# Altium PCB PCB_OPLL+DCSG MegaMod_2021-11-02.pcbdoc
Units mil, origin at the board's own origin, x right, y up, seen from the top; angles counter-clockwise.
Board outline 5030 x 3545 mil, 2 copper layers (Top Layer, Bottom Layer); 26 components, 32 nets, 155 pads, 12 vias.
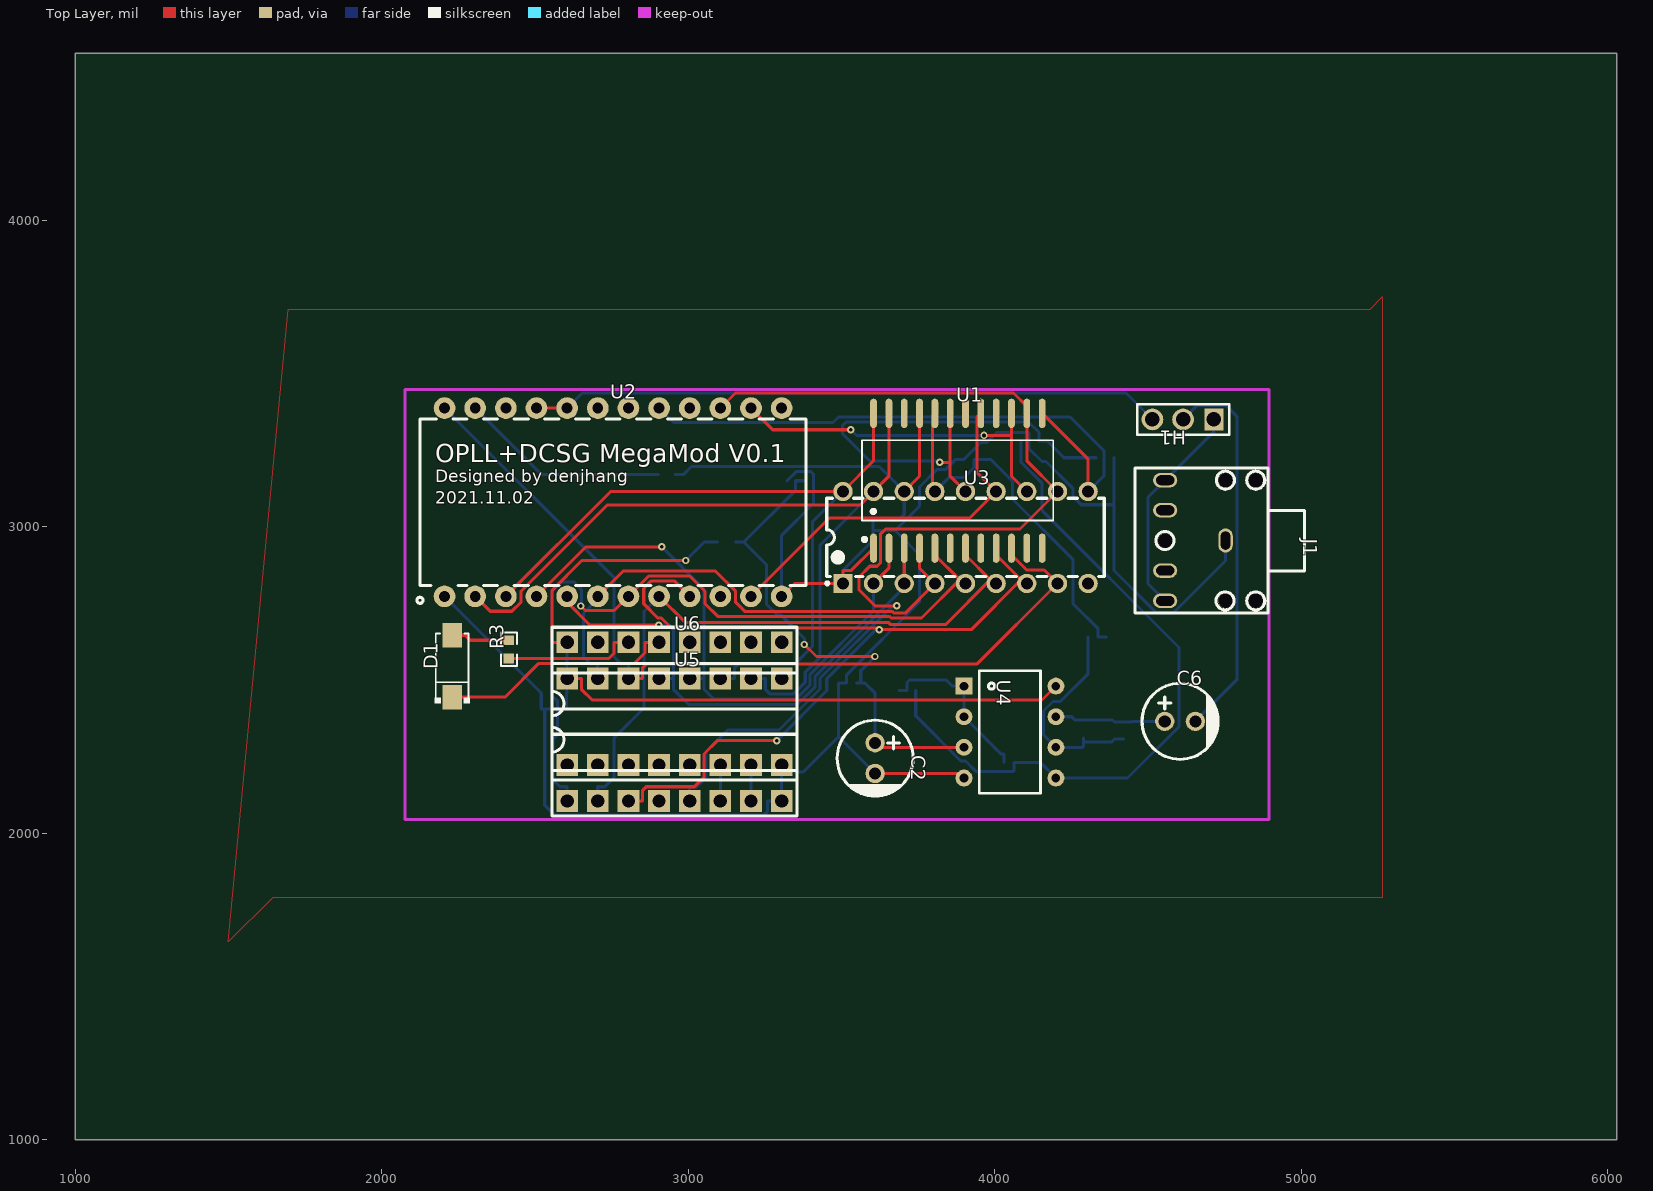
[diagram p0: Top Layer view]
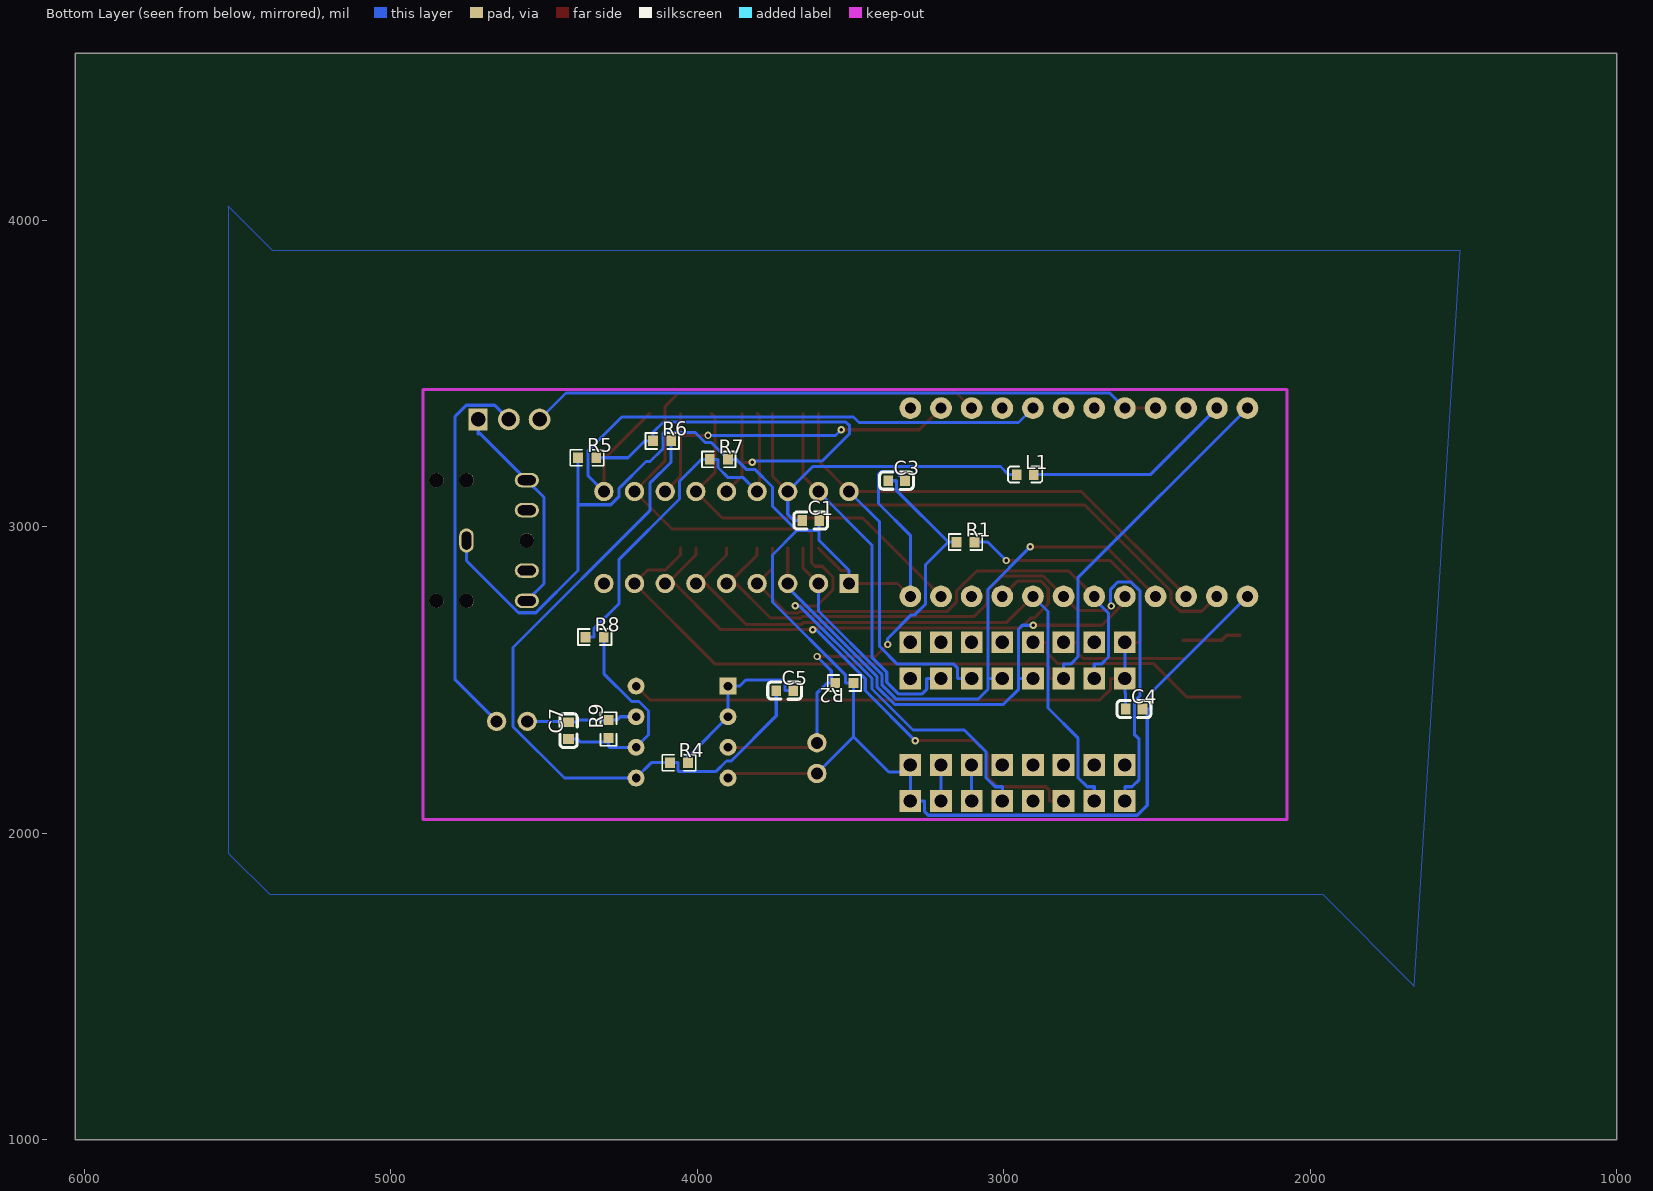
[diagram p1: Bottom Layer view, seen from below]

## Layer stack, top to bottom
Top Layer: signal copper (thickness not stored)
Dielectric: dielectric 12.6, FR-4, Dk 4.8
Bottom Layer: signal copper (thickness not stored)

## Board outline
6030,1000 1000,1000 1000,4545 6030,4545

## Components (designator, comment, footprint, x,y, rotation, side; value= is the part's Value field where it differs from the comment)
C1 "0.1u" C0603 3630,3020 r0 bottom
C2 "10uF" CAP-TH_BD6.3-P2.50-D1.0-FD 3610,2245 r270 top
C3 "0.1u" C0603 3350,3150 r0 bottom
C4 "0.1u" C0603 2575,2405 r0 bottom
C5 "390p" C0603 3715,2465 r0 bottom
C6 "4.7uF" CAP-TH_BD6.3-P2.50-D1.0-FD 4605,2365 r0 top
C7 "390p" C0603 4420,2335 r270 bottom
D1 "SS14" SMA_L4.4-W2.8-LS5.4-RD 2230,2545 r90 top
H1 "Header-Male-2.54_1x3" HDR-TH_3P-P2.54-V-M-1 4615,3350 r180 top
J1 "PJ-307C" AUDIO-TH_PJ307C 4655,2955 r270 top
L1 "100Ω" L0603 2930,3170 r0 bottom
R1 "1k" R0603#1 3125,2950 r0 bottom
R2 "1k" R0603#1 3520,2490 r180 bottom
R3 "1k" R0603#2 2415,2600 r90 top
R4 "51k" R0603#1 4060,2230 r0 bottom
R5 "2.2k" R0603#1 4360,3225 r0 bottom
R6 "4.7k" R0603#1 4115,3280 r0 bottom
R7 "2.2k" R0603#1 3930,3220 r0 bottom
R8 "4.7k" R0603#1 4335,2640 r0 bottom
R9 "51k" R0603#1 4290,2340 r270 bottom
U1 "YM2413-F" SOIC24-YMF276 3855,3170 r0 top
U2 "MegaGRRL IC-FM" DIP-24_L32.0-W13.8-P2.54-LS15.6-BL 2755,3080 r0 top
U3 "YM2413" DIP-18_L23.0-W6.5-P2.54-LS7.6-BL 3905,2965 r0 top
U4 "SA5532AP" DIP8 4050,2330 r270 top
U5 "SN76489" DIP-16_L20.3-W10.2-P2.54-LS10.2-BL 2955,2305 r0 top
U6 "MegaGRRL IC PSG" DIP-16_L20.3-W10.2-P2.54-LS10.2-BL 2955.12,2422.79 r0 top

## Footprints (in the part's own frame and the unit in brackets; to place one, negate y for a bottom-side part, rotate by r counter-clockwise, add the part's x,y. Pads: shape width x height; smd on the part's side, far side on the other; paste and mask are expansions set on the pad)
AUDIO-TH_PJ307C [mm]
  oval 2x1.2 hole 0.8 slot 1.5 at 0 deg: 1(0,2.5)
  oval 1.2x2 hole 0.8 slot 1.5 at 90 deg: 2(5,-2.5) 3(2.489,-2.5) 4(-2.511,-2.5) 5(-5,-2.5)
  round 1.2 hole 1.2 unplated: ""(-5,2.5) ""(-5,5) ""(0,-2.5) ""(5,2.5) ""(5,5)
  silkscreen extent -6.01,-4.99 5.99,9.03
C0603 [mm]
  rect 0.8x0.9 smd: 1(0.7,0) 2(-0.7,0)
  silkscreen extent -1.39,-0.72 1.41,0.71
CAP-TH_BD6.3-P2.50-D1.0-FD [mm]
  round 1.6 hole 1: 1(-1.27,0) 2(1.27,0)
  silkscreen extent -3.15,-3.15 3.17,3.15
DIP8 [mil]
  rect 55x55 hole 28: 1(-150,-150)
  round 55 hole 28: 2(-50,-150) 3(50,-150) 4(150,-150) 5(150,150) 6(50,150) 7(-50,150) 8(-150,150)
  silkscreen extent -200,-100 200,100
DIP-16_L20.3-W10.2-P2.54-LS10.2-BL [mm]
  rect 1.8x1.8 hole 1.1: 1(-8.89,-5.08) 2(-6.35,-5.08) 3(-3.81,-5.08) 4(-1.27,-5.08) 5(1.27,-5.08) 6(3.81,-5.08) 7(6.35,-5.08) 8(8.89,-5.08) 9(8.89,5.08) 10(6.35,5.08) 11(3.81,5.08) 12(1.27,5.08) 13(-1.27,5.08) 14(-3.81,5.08) 15(-6.35,5.08) 16(-8.89,5.08)
  silkscreen extent -10.16,-6.33 10.16,6.33
DIP-18_L23.0-W6.5-P2.54-LS7.6-BL [mm]
  rect 1.6x1.6 hole 1: 1(-10.16,-3.81)
  round 1.6 hole 1: 2(-7.62,-3.81) 3(-5.08,-3.81) 4(-2.54,-3.81) 5(0,-3.81) 6(2.54,-3.81) 7(5.08,-3.81) 8(7.62,-3.81) 9(10.16,-3.81) 10(10.16,3.81) 11(7.62,3.81) 12(5.08,3.81) 13(2.54,3.81) 14(0,3.81) 15(-2.54,3.81) 16(-5.08,3.81) 17(-7.62,3.81) 18(-10.16,3.81)
  silkscreen extent -11.58,-3.93 11.5,3.25
DIP-24_L32.0-W13.8-P2.54-LS15.6-BL [mm]
  round 1.8 hole 0.9: 1(-13.97,-7.8) 2(-11.43,-7.8) 3(-8.89,-7.8) 4(-6.35,-7.8) 5(-3.81,-7.8) 6(-1.27,-7.8) 7(1.27,-7.8) 8(3.81,-7.8) 9(6.35,-7.8) 10(8.89,-7.8) 11(11.43,-7.8) 12(13.97,-7.8) 13(13.97,7.8) 14(11.43,7.8) 15(8.89,7.8) 16(6.35,7.8) 17(3.81,7.8) 18(1.27,7.8) 19(-1.27,7.8) 20(-3.81,7.8) 21(-6.35,7.8) 22(-8.89,7.8) 23(-11.43,7.8) 24(-13.97,7.8)
  silkscreen extent -16.26,-8.38 16,6.9
HDR-TH_3P-P2.54-V-M-1 [mm]
  rect 1.575x1.8 hole 1.2: 1(-2.54,0)
  round 1.8 hole 1.2: 2(0,0) 3(2.54,0)
  silkscreen extent -3.81,-1.27 3.81,1.27
L0603 [mm]
  rect 0.8x0.864 smd: 1(-0.7,0) 2(0.7,0)
  silkscreen extent -1.41,-0.67 1.42,0.65
R0603#1 [mil]
  rect 31.75x34.02 smd: 1(29.66,0) 2(-29.66,0)
  silkscreen extent -55,-26 55,26
R0603#2 [mil]
  rect 31.75x34.02 smd: 1(-29.66,0) 2(29.66,0)
  silkscreen extent -55,-26 55,26
SMA_L4.4-W2.8-LS5.4-RD [mm]
  rect 2.046x1.62 smd: 1(-2.566,0) 2(2.565,0)
  silkscreen extent -3.08,-1.44 2.7,1.44
SOIC24-YMF276 [mil]
  oval 22.05x95.74 smd: 1(-250,-240) 2(-200,-240) 3(-150,-240) 4(-100,-240) 5(-50,-240) 6(0,-240) 7(50,-240) 8(100,-240) 9(150,-240) 10(200,-240) 11(250,-240) 12(300,-240) 13(300,200) 14(250,200) 15(200,200) 16(150,200) 17(100,200) 18(50,200) 19(0,200) 20(-50,200) 21(-100,200) 22(-150,200) 23(-200,200) 24(-250,200)
  silkscreen extent -288,-217 336,112

## Via types
v1: diameter 24.02, hole 12.01, Top Layer to Bottom Layer, 12 vias

## Nets (pads, with @x,y where several pads share a name; then routed paths per layer and width w, separated by ;. In a path a pad name is that pad's centre, name@x,y a point inside that pad or via, vN(x,y) a via of type N, cw(c..) or ccw(c..) an arc to the next point about the centre after c; other vN are vias at no path point)
+5V: L1.1 U2.23 | length 687.4
  Bottom Layer w10: U2.23 2522.09,3170 L1.1
/CS: U1.15 U2.14 U3.12 | length 1162.6
  Top Layer w10: U2.14 3275.68,3316.41 v1(3530.59,3316.41) ; v1(3965.19,3297.94) 4055,3297.94 ; U1.15 4055,3297.94 ; U3.12 4055,3165 4055,3297.94
  Bottom Layer w10: v1(3530.59,3316.41) 3549.06,3297.94 v1(3965.19,3297.94)
/IC: U1.17 U2.11 U3.13 | length 1228.1
  Top Layer w10: U2.11 3460.54,3028.45 3918.46,3028.46 U3.13 3942.11,3177.89 3942.11,3357.11 U1.17
/OE: U5.6 U6.6 | length 117.8
  Bottom Layer w10: U5.6 3105,2151.5 3105.12,2151.62 U6.6
/WR: U1.14 U2.15 U3.11 U5.5 | length 3398.6
  Top Layer w10: U2.15 3154.23,3436.32 4061.67,3436.32 4105,3392.99 U1.14 4105,3215 U3.11 4082.69,2992.69 3644.34,2992.69 3627.1,2975.45 3627.1,2881.82 3616.33,2871.05 3592.06,2871.05 3557.22,2836.21 3557.22,2794.3 3609.47,2742.05 v1@3680.26,2742.05
  Bottom Layer w10: U5.5 3005,2151.5 3028.25,2151.5 3058.49,2181.74 3058.49,2266.49 3128.76,2336.76 3296.4,2336.76 3430.38,2470.74 3430.38,2505.11 3667.31,2742.04 v1(3680.26,2742.05)
A0: U1.13 U2.17 U3.10 | length 1996.2
  Top Layer w10: U1.13 4305,3220 U3.10
  Bottom Layer w10: U2.17 2952,3340.09 3472.32,3340.09 3490.32,3358.09 4246.44,3358.09 4357.3,3247.23 4357.3,3167.3 U3.10
A.VCC: C4.1 R1.2 U4.8 U5.16 U6.16 | length 2705
  Top Layer w10: U5.16 2651.5,2505 2651.5,2470.12 2687.05,2434.57 4154.57,2434.57 U4.8 ; U6.16 2558.61,2622.79 2555,2626.4 2555,2791.49 2653.17,2889.66 v1(2992.37,2889.66)
  Bottom Layer w10: C4.1 2602.56,2456.06 2605,2458.5 U5.16 2605,2576.17 2605.12,2576.29 2605.12,2599.54 2605.12,2607.87 U6.16 ; v1(2992.37,2889.66) 3052.71,2950 3068.4,2950 R1.2
C6_2: C6.2 H1.2 | length 1261.1
  Bottom Layer w10: H1.2 4661.51,3396.51 4754.15,3396.51 4790.52,3360.14 4790.52,2500.52 C6.2
D0: U1.23 U2.2 U3.17 U5.10 | length 2728.1
  Top Layer w10: U2.2 2353.79,2724.12 2424.58,2724.12 2455,2754.54 2455,2790.07 2735.93,3071 3561,3071 U3.17 3655,3165 U1.23
  Bottom Layer w10: U5.10 3251.5,2505 3251.5,2470.12 3268.02,2453.6 3342.75,2453.6 3382.11,2492.96 3382.11,2525.12 3430.67,2573.68 3430.67,2940.67 U3.17
D1: U1.24 U2.3 U3.18 U5.11 | length 2449.1
  Top Layer w10: U2.3 2747.09,3115 U3.18 3605,3215 U1.24
  Bottom Layer w10: U5.11 3151.5,2505 3151.5,2539.88 3163.12,2551.5 3347.52,2551.5 3405.16,2609.14 3405.16,3015.16 U3.18
D1_2: D1.2 R3.2 | length 191.8
  Top Layer w10: D1.2 2272.96,2646 2289.3,2629.66 R3.2
D2: U1.2 U2.4 U3.2 U5.12 | length 1974.7
  Top Layer w10: U2.4 2666.33,2934.24 v1(2913.36,2934.24) ; U3.2 3655,2865 U1.2
  Bottom Layer w10: v1(2913.36,2934.24) 3051.63,2795.97 3051.63,2505.13 3051.5,2505 ; U5.12 3051.5,2505 ; U3.2 3605,2725.25 3398.2,2518.45 3398.2,2484.48 3351.22,2437.5 3084.12,2437.5 3051.5,2470.12 3051.5,2505
D3: U1.3 U2.5 U3.3 U5.13 | length 1725
  Top Layer w10: U2.5 2605,2753.16 2679.57,2678.59 v1(2903.69,2678.59) ; U3.3 U1.3
  Bottom Layer w10: v1(2903.69,2678.59) 2939.41,2678.59 2951.63,2666.37 2951.63,2505.13 2951.5,2505 ; U5.13 2951.5,2505 ; U3.3 3705,2802.49 3414.29,2511.78 3414.29,2477.81 3356.79,2420.31 3001.31,2420.31 2951.5,2470.12 2951.5,2505
D4: U1.4 U2.6 U3.4 U5.15 | length 1708
  Top Layer w10: U2.6 2787.72,2855.63 3088.6,2855.63 3155.01,2789.22 3155.01,2753.25 3184.39,2723.87 3665.79,2723.87 3671.47,2718.19 3708.19,2718.19 U3.4 3755,2865 U1.4
  Bottom Layer w10: U5.15 2705,2551.5 2681.79,2551.5 2658.6,2574.69 2658.6,2717.67 2705,2764.07 U2.6
D5: U1.5 U2.7 U3.5 U5.1 | length 2487.9
  Top Layer w10: v1(2649.54,2741.26) 2664.4,2726.4 2758.49,2726.4 U2.7 2871.63,2839.54 3004.69,2839.54 3055,2789.23 3055,2748.86 3096.08,2707.78 3656.01,2707.78 3661.69,2702.1 3761.56,2702.1 U3.5@3886.04,2826.58 ; U1.5 3805,2907.62 U3.5@3886.04,2826.58 ; U3.5 3897.62,2815 U3.5@3886.04,2826.58
  Bottom Layer w10: U5.1 2605,2151.5 2581.79,2151.5 2558.6,2174.69 2558.6,2307.02 2574.27,2322.69 2574.27,2430.32 2555,2449.59 2555,2789.02 2585.4,2819.42 2627.81,2819.42 2651.51,2795.72 2651.51,2743.23 v1(2649.54,2741.26)
D6: U1.7 U2.8 U3.6 U5.2 | length 2105.1
  Top Layer w10: U2.8 2990,2687.91 3653.12,2687.91 3660.71,2680.32 3839.78,2680.32 U3.6@3986.04,2826.58 ; U1.7 3905,2907.62 U3.6@3986.04,2826.58 ; U3.6 3997.62,2815 U3.6@3986.04,2826.58
  Bottom Layer w10: U5.2 2705,2151.5 2728.25,2151.5 2758.49,2181.74 2758.49,2311.26 2855.75,2408.52 2855.75,2723.66 U2.8
D7: U1.9 U2.9 U3.7 U5.3 | length 2862.9
  Top Layer w10: U5.3 2851.5,2105 2851.5,2139.88 2863.12,2151.5 3020.34,2151.5 3051.63,2182.79 3051.63,2258.49 3095.13,2301.99 v1(3288.54,2301.99) ; U2.9 2954.46,2823.45 2879.99,2823.45 2855,2798.46 2855,2748.46 2901.79,2701.67 2913.26,2701.67 2945.63,2669.3 3618.66,2669.3 v1(3623.73,2664.23) 3923.69,2664.23 U3.7@4086.04,2826.58 ; U1.9 4005,2907.62 U3.7@4086.04,2826.58 ; U3.7 4097.62,2815 U3.7@4086.04,2826.58
  Bottom Layer w10: v1(3288.54,2301.99) 3452.15,2465.6 3452.15,2504.12 3612.26,2664.23 v1(3623.73,2664.23)
GND: C1.2 C2.2 C3.2 C4.2 J1.1 R2.1 R5.1 R7.2 U1.1 U2.1 U2.12 U3.1 U4.4 U5.8 U6.8 | length 6517
  Top Layer w10: U2.12 3347.09,2815 U3.1 3505,2857.57 3532.57,2857.57 U1.1 ; C2.2 3885,2195 U4.4
  Bottom Layer w10: U2.1 2520.62,2457.29 2520.62,2405 C4.2@2532.04,2405 ; C4.2 C4.2@2532.04,2405 ; U2.12 3305,2971.83 3408.99,3075.82 3408.99,3171.73 3400.94,3179.78 3352.22,3179.78 C3.2 ; U6.8 U6.8@3305.12,2199.54 ; U3.1 3505,2857.57 3602.44,2955.01 3602.44,2987.51 ; C1.2 3602.44,2987.51 ; C2.2 3490.34,2314.66 ; R5.1 4389.66,3071.68 ; J1.1 4753.43,2889.22 4583.55,2719.34 4527.24,2719.34 4389.66,2856.92 4389.66,3071.68 ; C4.2@2532.04,2405 2532.04,2090.84 2564.38,2058.5 3246.88,2058.5 3258.5,2070.12 3258.5,2105 U5.8 3305,2176.17 3305.12,2176.29 U6.8@3305.12,2199.54 ; U6.8@3305.12,2199.54 3375.22,2199.54 3490.34,2314.66 ; 3490.34,2314.66 R2.1 3517.29,2490 3517.29,2516.95 3755.02,2754.68 3755.02,2907.76 3675.27,2987.51 ; 3602.44,2987.51 3675.27,2987.51 ; 3675.27,2987.51 3755.02,3067.26 3755.02,3129.9 3812.29,3187.17 3840.57,3187.17 3873.4,3220 R7.2 3955.2,3274.86 3974.75,3274.86 4007.98,3308.09 4109.37,3308.09 4112.3,3305.16 4112.3,3254.78 4154.47,3212.61 4167.61,3212.61 4255.02,3125.2 4255.02,3099.2 4282.54,3071.68 4389.66,3071.68
IN.L: H1.3 U2.20 U2.21 | length 2066.1
  Top Layer w10: U2.21 U2.20
  Bottom Layer w10: U2.20 2654.23,3436.32 4428.68,3436.32 H1.3
MCLK: U1.10 U2.24 U3.8 U5.14 | length 2903.5
  Top Layer w10: U5.14 2851.5,2505 2851.5,2539.88 2863.12,2551.5 3941.5,2551.5 U3.8 4161.39,2858.61 4104.64,2858.61 4055,2908.25 U1.10
  Bottom Layer w10: U2.24 2758.5,2833.59 2758.5,2574.74 2781.74,2551.5 2805,2551.5 U5.14
MO: R5.2 R6.1 U1.19 U3.14 | length 1589.5
  Top Layer w10: v1@3820.97,3210.25 3855,3210.25 ; U1.19 3855,3210.25 ; U3.14 3855,3165 3855,3210.25
  Bottom Layer w10: v1@3820.97,3210.25 3816.79,3214.43 3592.66,3214.44 3502.92,3304.18 3502.92,3329.38 3515.54,3342 4110.74,3342 4144.66,3308.08 R6.1 4171.6,3280 4226.6,3225 R5.2
  other v1: 3820.97,3210.25
OUT.L: H1.1 J1.2 J1.5 | length 707.9
  Bottom Layer w10: J1.2 4500.45,2814.28 4500.45,3095.72 4556.58,3151.85 4708.23,3303.5 4715,3303.5 H1.1
PSG_SND: U5.7 U6.7 | length 117.8
  Bottom Layer w10: U5.7 3205,2151.5 3205.12,2151.62 U6.7
R4_1: C5.1 R4.1 R6.2 U4.5 | length 2279.6
  Bottom Layer w10: C5.1 3742.56,2382.9 3889.75,2235.71 3904.78,2235.71 3938.58,2201.91 4061.57,2201.91 4062.71,2203.05 4062.71,2230 R4.1 4150,2230 U4.5 4433.77,2180 4601.45,2347.68 4601.45,2606.17 4155.02,3052.6 4155.02,3141.66 4085.34,3211.34 R6.2
R9_1: C7.1 R8.2 R9.1 U4.6 | length 704.2
  Bottom Layer w10: R9.1 R9.1@4290,2296.87 ; R8.2 4305.34,2520.75 4214.59,2430 4190.61,2430 4159.24,2398.63 4159.24,2320.76 U4.6 4286.6,2280 4290,2283.4 R9.1@4290,2296.87 ; C7.1 4391.21,2307.44 4380.64,2296.87 R9.1@4290,2296.87
R9_2: C6.1 C7.2 R9.2 U4.7 | length 363.2
  Bottom Layer w10: U4.7 4251.58,2380 4261.92,2369.66 4275.96,2369.66 R9.2 4384.11,2369.66 4391.21,2362.56 C7.2 4448.79,2362.56 4451.23,2365 C6.1
RO: R7.1 R8.1 U1.20 U3.15 | length 1254.2
  Top Layer w10: U3.15 3797.89,3122.11 3797.89,3362.89 U1.20
  Bottom Layer w10: U3.15 3850.07,3160.07 3899.73,3160.07 3932.71,3193.05 3932.71,3220 3946.19,3220 R7.1 3986.6,3220 4058.4,3148.2 4058.4,3090.36 4255.02,2893.74 4255.02,2749.64 4337.71,2666.95 4337.71,2640 R8.1
U4_3: C2.1 C3.1 R1.1 R2.2 U4.3 | length 1630.7
  Top Layer w10: v1(3379.24,2615.87) 3418.75,2576.36 v1(3609.35,2576.36) ; C2.1 3625,2280 U4.3
  Bottom Layer w10: R1.1 3181.6,2950 ; C3.1 3350.74,3150 3350.74,3119.14 3181.6,2950 ; v1(3379.24,2615.87) 3379.24,2635.47 3302.16,2712.55 3290.36,2712.55 3255,2747.91 3255,2876.6 3181.6,2950 ; R2.2 R2.2@3563.13,2490 ; v1(3609.35,2576.36) 3563.13,2530.14 R2.2@3563.13,2490 ; C2.1 3610,2456.6 3576.6,2490 R2.2@3563.13,2490
U6_13: D1.1 U6.13 | length 769.6
  Top Layer w10: D1.1 2402.4,2444 2512.64,2554.24 2824.93,2554.24 2858.61,2587.92 2858.61,2622.79 U6.13
U6_14: R3.1 U6.14 | length 432.3
  Top Layer w10: R3.1 2741.03,2570.34 2758.61,2587.92 2758.61,2622.79 U6.14
VCC: C1.1 L1.2 U1.21 U3.16 | length 1198.4
  Top Layer w10: U3.16 3755,3165 U1.21
  Bottom Layer w10: L1.2 2984.38,3170 3011.1,3196.72 3623.28,3196.72 U3.16 3705,3040.62 3684.38,3020 C1.1
VREF: C5.2 R4.2 U4.1 U4.2 | length 559.8
  Bottom Layer w10: C5.2 3714.26,2465 3714.26,2491.82 3722.18,2499.74 3841.69,2499.74 3861.43,2480 U4.1 U4.2 4021.92,2258.08 4030.34,2258.08 R4.2
pads on no net: J1. J1.3 J1.4 U1.6 U1.8 U1.11 U1.12 U1.16 U1.18 U1.22 U2.10 U2.13 U2.16 U2.18 U2.19 U2.22 U3.9 U5.4 U5.9 U6.1 U6.2 U6.3 U6.4 U6.5 U6.9 U6.10 U6.11 U6.12 U6.15

## Polygon pours and split planes (outlines as drawn)
GND on Bottom Layer (solid): 1510,3900 5385,3900 5530,4045 5530,1935 5395,1800 1960,1800 1660,1500
GND on Top Layer (solid): 1695,3710 5225,3710 5265,3750 5265,1790 1645,1790 1500,1645

## Silkscreen, mask and mechanical layers (free items; w line width, h text height)
Top Overlay:
  text "OPLL+DCSG MegaMod V0.1" at 2175,3210.47 h59.05
  text "Designed by denjhang" at 2175,3144.68 h40.63
  text "2021.11.02" at 2175,3074.68 h40.63